# Altium PCB PCB v1.0.PcbDoc
Units mm, origin at the board's own origin, x right, y up, seen from the top; angles counter-clockwise.
Board outline 37.7 x 80 mm, 2 copper layers (Top Layer, Bottom Layer); 68 components, 54 nets, 253 pads, 31 vias.
Unrouted connection lines stored in the file: 10.
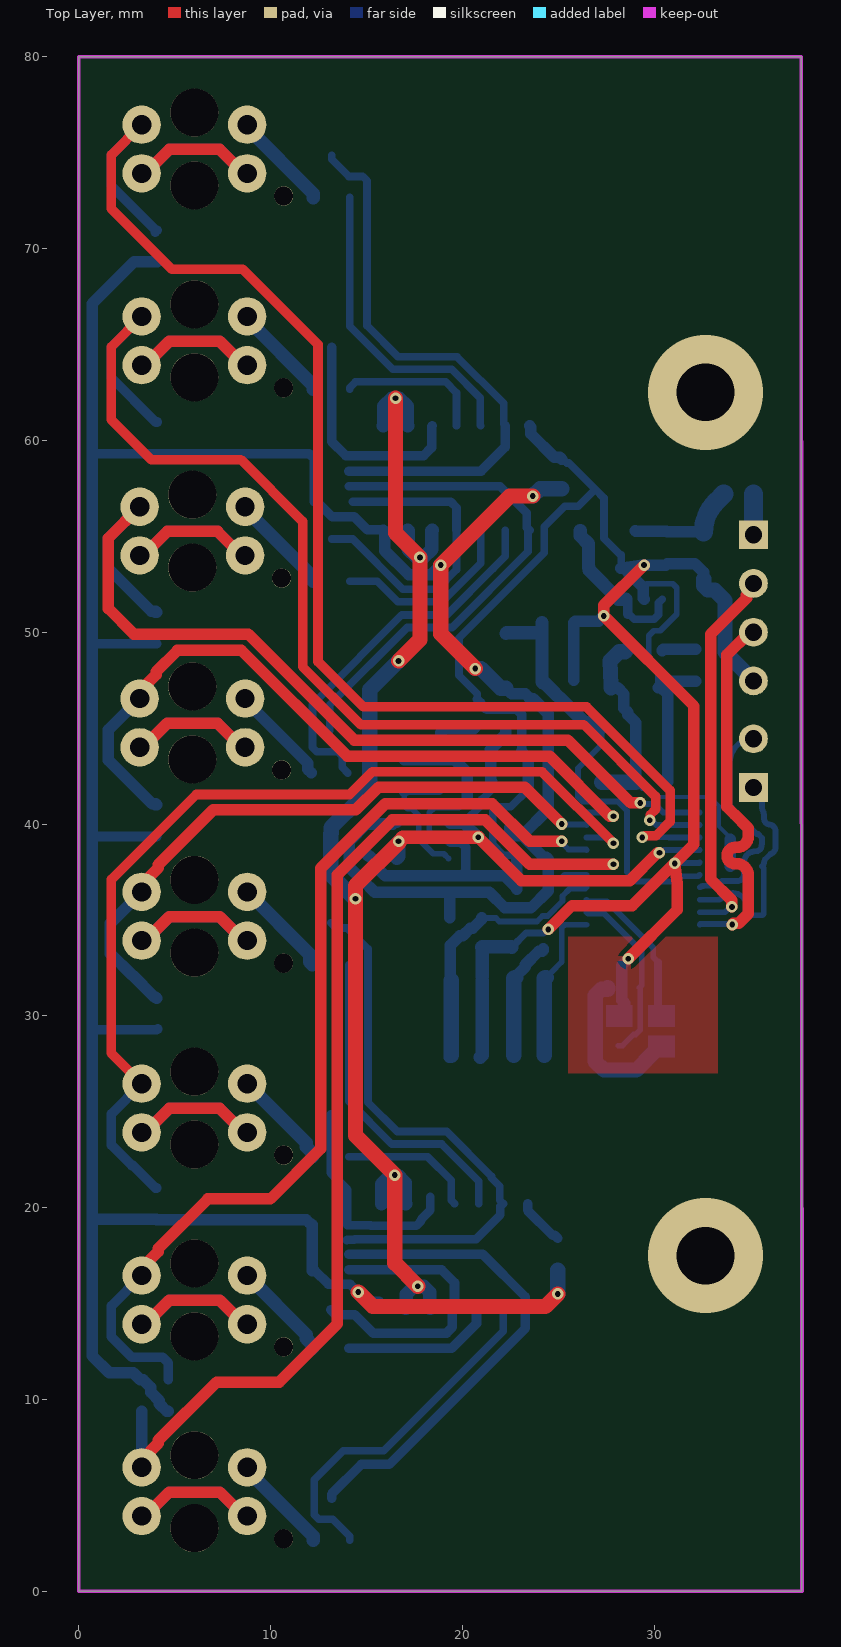
[diagram p0: Top Layer view]
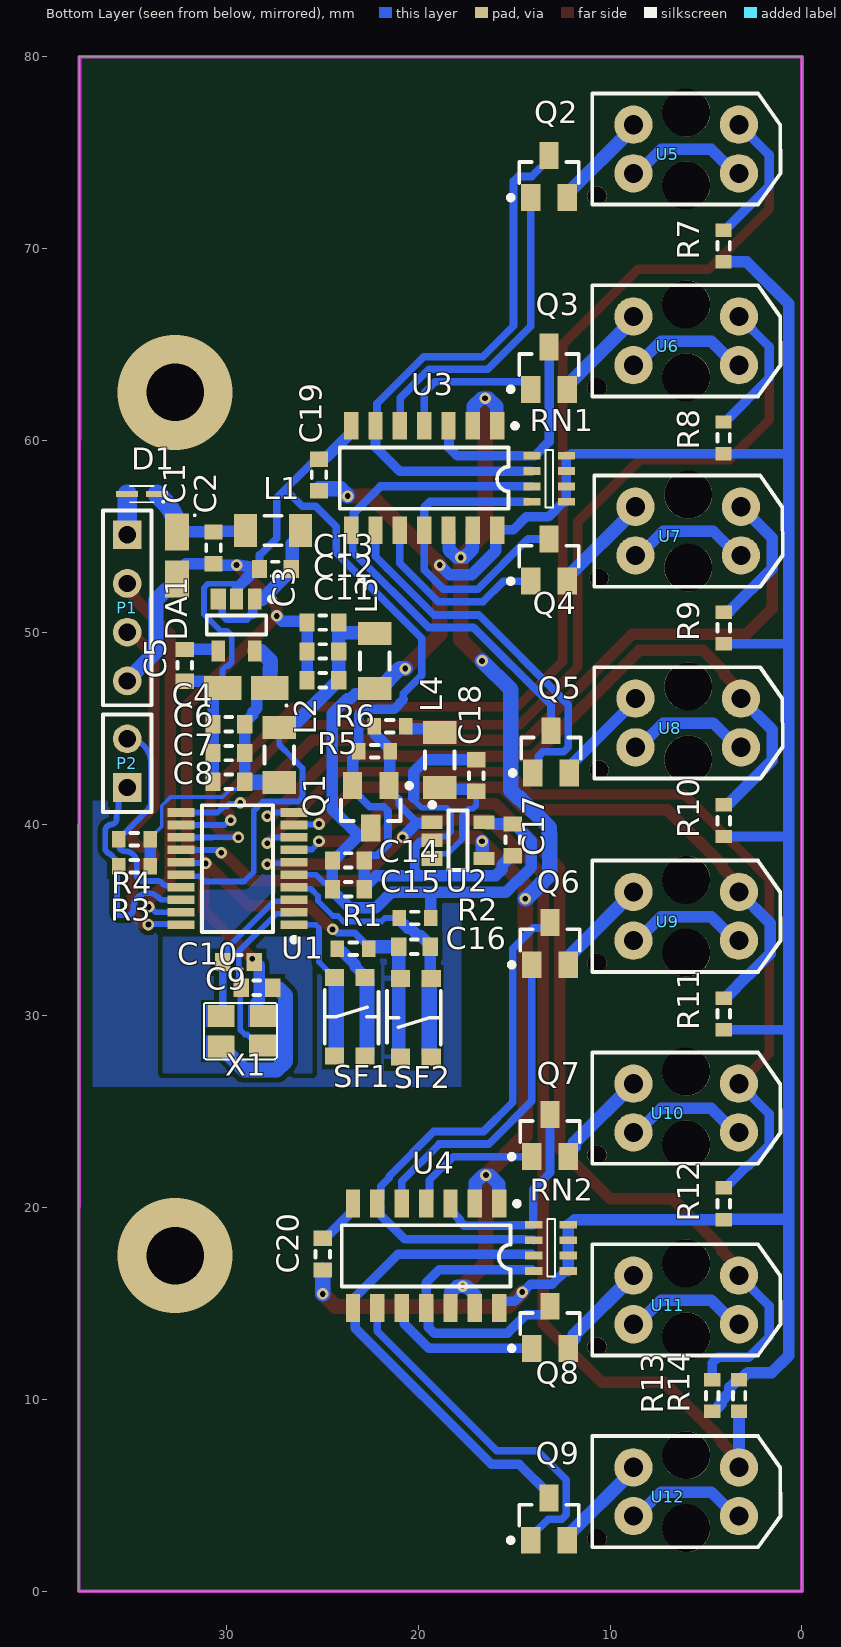
[diagram p1: Bottom Layer view, seen from below]
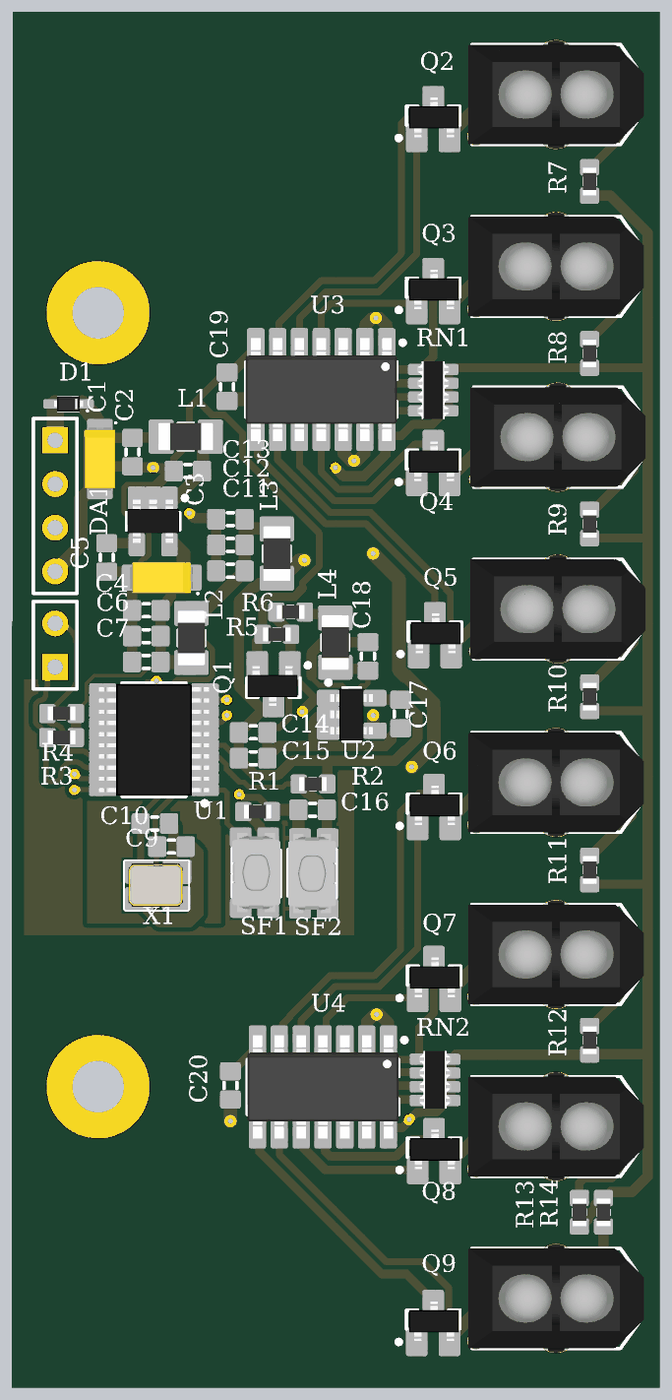
[diagram p2: 3D render of the assembled board from below, using the file's embedded part models]

## Layer stack, top to bottom
Top Solder: solder mask 0.0102, Solder Resist, Dk 3.5
Top Layer: signal copper 0.0356
Dielectric 1: dielectric 0.32, FR-4, Dk 4.8
Bottom Layer: signal copper 0.0356
Bottom Solder: solder mask 0.0102, Solder Resist, Dk 3.5

## Board outline
0,0 0,80 37.67,80 37.7,0

## Design rules (kind name [scope] priority, off if disabled: settings)
Clearance [All] p1: gap=0.254 ignorepadtopadclearanceinfootprint=FALSE except(0: Arc-Hole Track-Hole SMDPad-Hole THPad-Hole Via-Hole Fill-Hole Poly-Hole Region-Hole Text-Hole; 0.127: SMDPad-SMDPad; 0.2: Arc-SMDPad Track-SMDPad; 0.33: Arc-THPad Track-THPad)
DiffPairsRouting [All] p1: maxlimit=0.254 minlimit=0.254 mostfreqgap=0.254 toplayer_minwidth=0.254 toplayer_maxwidth=0.381 toplayer_prefwidth=0.381 bottomlayer_minwidth=0.254 bottomlayer_maxwidth=0.381 bottomlayer_prefwidth=0.381 maxuncoupledlength=12.7
HoleSize [All] p1: absolutevalues=TRUE maxlimit=6.3 minlimit=0.3 maxpercent=80.000 minpercent=20.000
HoleToHoleClearance [All] p1: gap=0.54 allowstackedmicrovias=TRUE
PasteMaskExpansion [All] p1: expansion=0.13
PolygonConnect [All] p1: connectstyle=Relief reliefconductorwidth=0.254 reliefentries=4 polygonreliefangle="90 Angle" airgapwidth=0.254
RoutingCorners [All] p1: cornerstyle=Round minsetback=2.54 maxsetback=2.54
RoutingVias [All] p1: holewidth=0.3 width=0.6 viastyle="Through Hole" minholewidth=0.3 minwidth=0.6 maxholewidth=6.3 maxwidth=6.5
SilkToSolderMaskClearance [IsPad] p1: minsilkscreentomaskgap=0.15 clearancetoexposedcopper=TRUE
SolderMaskExpansion [All] p1: expansion=0.05 istentingtop=FALSE
Width [All] p1: maxlimit=2 minlimit=0.127 preferedwidth=0.3
24 further rules are at their usual default settings.

## Classes and differential pairs
component class Schematic_page3: C17 C18 C19 C20 L4 Q1 Q2 Q3 Q4 Q5 Q6 Q7 Q8 Q9 R5 R6 R7 R8 R9 R10 R11 R12 R13 R14 U2 U3 U4 U5 U6 U7 U8 U9 U10 U11 U12
component class Schematic_page2: C9 C10 C16 P1 P2 R1 R2 R3 R4 SF1 SF2 U1 X1
component class Schematic_page1: C1 C2 C3 C4 C5 C6 C7 C8 C11 C12 C13 C14 C15 D1 D? DA1 DA? L1 L2 L3

## Components (designator, comment, footprint, x,y, rotation, side; value= is the part's Value field where it differs from the comment)
C1 "2.2 uF" TANT-A 32.575,54 r270 bottom
C2 "0.1 uF" C0603 30.675,54.4 r270 bottom
C3 "0.1 uF" C0603 27.45,53.3 r0 bottom
C4 "2.2 uF" TANT-A 28.975,47.1 r0 bottom
C5 "0.01 uF" C0603 32.175,48.275 r270 bottom
C6 "0.1 uF" C0603 29.875,45.2 r0 bottom
C7 "0.01 uF" C0603 29.875,43.7 r0 bottom
C8 "100 pF" C0603 29.875,42.2 r0 bottom
C9 "20 pF" C0603 28.412,31.463 r180 bottom
C10 "20 pF" C0603 29.375,32.8 r180 bottom
C11 "1 uF" C0603 24.975,47.5 r0 bottom
C12 "0.1 uF" C0603 24.975,49 r0 bottom
C13 "100 pF" C0603 24.975,50.5 r0 bottom
C14 "1 uF" C0603 23.65,38.1 r180 bottom
C15 "0.01 uF" C0603 23.65,36.6 r180 bottom
C16 "0.1 uF" C0603 20.2,33.6 r0 bottom
C17 "0.1 uF" C0603 15.075,39.175 r270 bottom
C18 "4.7 uF" C0603 16.975,42.525 r90 bottom
C19 "0.1 uF" C0603 25.175,58.2 r90 bottom
C20 "0.1 uF" C0603 24.975,17.575 r90 bottom
D1 "" SOD-523 34.4,57.2 r0 bottom
DA1 "TPS73033DBVR" SOT-23-5 29.476,50.378 r270 bottom
L1 "120R@100MHz" IND1206 27.575,55.3 r180 bottom
L2 "120R@100MHz" IND1206 27.25,43.593 r90 bottom
L3 "120R@100MHz" IND1206 22.275,48.5 r270 bottom
L4 "100 uH" IND1206 18.875,43.33 r270 bottom
P1 "SerialWire Debug" HDR1X4 35.175,55.08 r270 bottom
P2 "Header 2" HDR1X2 35.175,41.9 r90 bottom
Q1 "2N7002" SOT-23-3 22.475,40.9 r270 bottom
Q2 "MMBFJ201" SOT-23-3 13.182,73.76 r90 bottom
Q3 "MMBFJ201" SOT-23-3 13.182,63.76 r90 bottom
Q4 "MMBFJ201" SOT-23-3 13.182,53.76 r90 bottom
Q5 "MMBFJ201" SOT-23-3 13.082,43.76 r90 bottom
Q6 "MMBFJ201" SOT-23-3 13.131,33.76 r90 bottom
Q7 "MMBFJ201" SOT-23-3 13.131,23.76 r90 bottom
Q8 "MMBFJ201" SOT-23-3 13.131,13.76 r90 bottom
Q9 "MMBFJ201" SOT-23-3 13.181,3.76 r90 bottom
R1 "10 k" R0603 23.4,33.5 r0 bottom
R2 "10 k" R0603 20.175,35.1 r0 bottom
R3 "10 k" R0603 34.8,37.8 r0 bottom
R4 "10 k" R0603 34.8,39.2 r0 bottom
R5 "10 k" R0603 22.275,43.8 r0 bottom
R6 "10 k" R0603 21.475,45.1 r0 bottom
R7 "200 R" R0603 4.081,70.135 r270 bottom
R8 "200 R" R0603 4.081,60.135 r270 bottom
R9 "200 R" R0603 4.075,50.225 r270 bottom
R10 "200 R" R0603 4.075,40.175 r270 bottom
R11 "200 R" R0603 4.075,30.1 r270 bottom
R12 "200 R" R0603 4.075,20.2 r270 bottom
R13 "200 R" R0603 4.675,10.2 r270 bottom
R14 "200 R" R0603 3.275,10.2 r90 bottom
RN1 "2.2 k" RN_YC164-JR-072K2L 13.175,58 r0 bottom
RN2 "2.2 k" RN_YC164-JR-072K2L 13.075,17.9 r0 bottom
SF1 "Button" KMR221GLFS 22.175,27.45 r90 bottom
SF2 "Button" KMR221GLFS 21.525,32.4 r270 bottom
U1 "STM32F030F4P6" TSSOP-20 29.425,37.675 r0 bottom
U2 "AD8601WDRTZ-REEL7" SOT-23-5 17.928,39.149 r180 bottom
U3 "LM3900" SOIC-14 19.691,58.035 r270 bottom
U4 "LM3900" SOIC-14 19.592,17.485 r270 bottom
U5 "TCRT5000" TCRT5000 6.031,75.19 r270 bottom
U6 "TCRT5000" TCRT5000 6.031,65.19 r270 bottom
U7 "TCRT5000" TCRT5000 5.925,55.27 r270 bottom
U8 "TCRT5000" TCRT5000 5.925,45.27 r270 bottom
U9 "TCRT5000" TCRT5000 6.031,35.19 r270 bottom
U10 "TCRT5000" TCRT5000 6.031,25.19 r270 bottom
U11 "TCRT5000" TCRT5000 6.031,15.19 r270 bottom
U12 "TCRT5000" TCRT5000 6.031,5.19 r270 bottom
X1 "24.0000MHZ" TSX-3225 29.275,29.175 r0 bottom

## Footprints (in the part's own frame and the unit in brackets; to place one, negate y for a bottom-side part, rotate by r counter-clockwise, add the part's x,y. Pads: shape width x height; smd on the part's side, far side on the other; paste and mask are expansions set on the pad)
C0603 [mm]
  rect 0.8x0.95 smd: 1(-0.825,0) 2(0.825,0)
  silkscreen extent -0.18,-0.38 0.18,0.38, body extent -0.8,-0.4 0.8,0.4, height 0.5
HDR1X2 [mm] "Connector; Header; 2 Position"
  rect 1.5x1.5 hole 0.9: 1(0,0)
  round 1.5 hole 0.9: 2(2.54,0)
  silkscreen extent -1.27,-1.27 3.81,1.27
HDR1X4 [mm] "Connector; Header; 4 Position"
  rect 1.5x1.5 hole 0.9: 1(0,0)
  round 1.5 hole 0.9: 2(2.54,0) 3(5.08,0) 4(7.62,0)
  silkscreen extent -1.27,-1.27 8.89,1.27
IND1206 [mm]
  rect 1.2x1.74 smd: 1(-1.43,0) 2(1.43,0)
  silkscreen extent -0.45,-0.77 0.45,0.77, body extent -1.6,-0.8 1.6,0.8, height 1.8
KMR221GLFS [mm]
  rect 0.9x1 smd mask+0.102: 1(4.55,2.2)
  rect 0.9x1 smd: 2(0.45,2.2) 3(0.45,0.6) 4(4.55,0.6)
  silkscreen extent 1.1,-0.1 3.9,2.7, body extent 0.2,-0.1 4.8,2.7, height 1.92
R0603 [mm]
  rect 0.7x0.85 smd: 1(-0.825,0) 2(0.825,0)
  silkscreen extent -0.2,-0.33 0.2,0.33, body extent -0.8,-0.4 0.8,0.4, height 0.5
RN_YC164-JR-072K2L [mm] "Chip Array, ConvexE, 8-Leads, Pitch 0,80mm,  Body 3,20x1,60mm,  IPC Medium Density"
  rect 0.9x0.4 smd: 1(-0.9,1.2) 2(-0.9,0.4) 3(-0.9,-0.4) 4(-0.9,-1.2) 5(0.9,-1.2) 6(0.9,-0.4) 7(0.9,0.4) 8(0.9,1.2)
  silkscreen extent -0.2,-1.5 0.2,1.5, body extent -0.92,-1.68 0.92,1.68, height 0.7
SOD-523 [mm]
  rect 1.15x0.3 smd: 1(-0.775,0) 2(0.775,0)
  silkscreen extent -1.15,-0.43 0.63,0.45, body extent -0.85,-0.45 0.85,0.45, height 0.7
SOIC-14 [mm] "SOIC, 14-Leads, Body 7,15x3,90mm, Pitch 1,27mm, IPC Medium Density"
  rect 1.45x0.75 smd: 1(-2.725,3.81) 2(-2.725,2.54) 3(-2.725,1.27) 4(-2.725,0) 5(-2.725,-1.27) 6(-2.725,-2.54) 7(-2.725,-3.81) 8(2.725,-3.81) 9(2.725,-2.54) 10(2.725,-1.27) 11(2.725,0) 12(2.725,1.27) 13(2.725,2.54) 14(2.725,3.81)
  silkscreen extent -2.85,-4.4 1.6,4.86, body extent -3,-4.4 3,4.4, height 1.75
SOT-23-3 [mm]
  rect 1.4x1 smd: 1(-1.1,0.95) 2(-1.1,-0.95) 3(1.1,0)
  silkscreen extent -1.22,-1.55 0.75,2.12, body extent -1.05,-1.5 1.25,1.4, height 1
SOT-23-5 [mm] "SOT23, 5-Leads, Body 2,90x2,80mm, Pitch 0,95mm, IPC High Density"
  rect 1.1x0.7 smd: 1(-1.347,0.951) 2(-1.347,0.001) 4(1.353,-0.949) 5(1.353,0.951)
  rect 1.1x0.8 smd: 3(-1.347,-0.949)
  silkscreen extent -1.47,-1.55 0.5,1.98, body extent -1.25,-1.5 1.25,1.5, height 1.09
TANT-A [mm]
  rect 1.95x1.25 smd: 1(-1.225,0) 2(1.225,0)
  silkscreen extent -2.15,0.87 -2.05,0.97, body extent -2.39,-0.9 2.41,0.9, height 1.8
TCRT5000 [mm]
  round 2 hole 1: 1(-1.27,2.75) 2(1.27,2.75) 3(1.27,-2.75) 4(-1.27,-2.75)
  round 2.5 hole 2.5: 5(-1.9,0) 7(1.9,0)
  round 1 hole 1: 6(2.45,-4.65)
  silkscreen extent -2.9,-4.9 2.9,4.92, body extent -3.5,-5.1 3.5,5.1, height 7.02
TSSOP-20 [mm]
  rect 1.4x0.45 smd: 1(-2.95,2.925) 2(-2.95,2.275) 3(-2.95,1.625) 4(-2.95,0.975) 5(-2.95,0.325) 6(-2.95,-0.325) 7(-2.95,-0.975) 8(-2.95,-1.625) 9(-2.95,-2.275) 10(-2.95,-2.925) 11(2.95,-2.925) 12(2.95,-2.275) 13(2.95,-1.625) 14(2.95,-0.975) 15(2.95,-0.325) 16(2.95,0.325) 17(2.95,0.975) 18(2.95,1.625) 19(2.95,2.275) 20(2.95,2.925)
  silkscreen extent -3.07,-3.3 1.85,3.82, body extent -3.2,-3.25 3.2,3.25, height 1.1
TSX-3225 [mm] "Crystal"
  rect 1.4x1.15 smd: 1(-1.15,0.725) 2(1,0.775) 3(1,-0.825) 4(-1.2,-0.825)
  Top Layer region: 0.4,1.35 1.8,1.35 1.8,0.2 0.4,0.2
  Top Layer region: 0.4,-0.25 1.8,-0.25 1.8,-1.4 0.4,-1.4
  Top Layer region: -1.8,-0.25 -0.4,-0.25 -0.4,-1.4 -1.8,-1.4
  silkscreen extent -1.9,-1.5 1.9,1.45, body extent -1.55,-1.3 1.65,1.2, height 0.6

## Part data
C1 C4: library part Capasitor_Tantalum
C2 C3 C5 C9 C10 C11 C12 C13 C14 C15 C16 C17 C18 C19 C20: library part Capasitor
C6 C7 C8: library part Capasitor, Case=С0603
D1: library part "Diode Schottky"
DA1: library part TPS73033DBV, "IC REG LINEAR 3.3V 200MA SOT 23-5", Case=SOT-23-5, Manufacturer="Texas Instruments", HelpURL=https://www.digikey.com/product-detail/en/texas-instruments/TPS73033DBVR/296-17580-1-ND/705377, Model=TPS73033DBVR
L1 L2 L3 L4: library part Inductivity
P1: library part "Header 4", "Header, 4-Pin", LatestRevisionDate=17-Jul-2002, LatestRevisionNote="Re-released for DXP Platform.", Publisher="Altium Limited"
P2: "Header, 2-Pin", LatestRevisionDate=17-Jul-2002, LatestRevisionNote="Re-released for DXP Platform.", Publisher="Altium Limited"
Q1: "MOSFET N-Channel 60V 115mA (Ta) 200mW (Ta) Surface Mount SOT-23 (TO-236AB)", Case=SOT-23-3, Manufacturer="ON Semiconductor", HelpURL=https://www.digikey.com/product-detail/en/on-semiconductor/2N7002/2N7002NCT-ND/244664, Model="MOSFET N-CH 60V 115MA SOT-23"
Q2 Q3 Q4 Q5 Q6 Q7 Q8 Q9: "JFET N-Channel 40V 350mW Surface Mount SOT-23-3", Case=SOT-23-3, HelpURL=https://www.digikey.com/product-detail/en/on-semiconductor/MMBFJ201/MMBFJ201TR-ND/1049584, Manifacturer="ON Semiconductor", Model=MMBFJ201
R1 R2 R3 R4 R5 R6 R7 R8 R9 R10 R11 R12 R13 R14: library part Resistor
SF1 SF2: "SWITCH TACTILE SPST-NO 0.05A 32V", Case=KMR221GLFS, Manufacturer=C&K, HelpURL=https://www.digikey.com/product-detail/en/c-k/KMR221GLFS/401-1427-1-ND/550466, Model=KMR221GLFS
U1: "IC MCU 32BIT 16KB FLASH 20TSSOP", Case=TSSOP-20, Manufacturer=STMicroelectronics, HelpURL=https://www.digikey.com/product-detail/en/stmicroelectronics/STM32F030F4P6TR/497-17333-1-ND/7650385, Model=STM32F030F4P6TR
U2: library part AD8601, "IC OPAMP GP 1 CIRCUIT SOT23-5", Case=SOT-23-5, Manufacturer="Analog Devices Inc.", HelpURL=https://www.digikey.com/product-detail/en/analog-devices-inc/AD8601WDRTZ-REEL7/AD8601WDRTZ-REEL7TR-ND/2237618, Model=AD8601WDRTZ-REEL7
U3 U4: "IC OPAMP GP 4 CIRCUIT 14SOIC", Case=SOIC-14, Manufacturer="Texas Instruments", HelpURL=https://www.digikey.com/product-detail/en/texas-instruments/LM3900D/296-9564-5-ND/379857, Model=LM3900D
U5 U6 U7 U8 U9 U10 U11 U12: "SENSOR OPTO TRANS 15MM REFL PCB", Manufacturer="Vishay Semiconductor Opto Division", Case=TCRT5000, HelpURL=https://www.digikey.com/product-detail/en/vishay-semiconductor-opto-division/TCRT5000/751-1033-5-ND/1681167, Model=TCRT5000
X1: library part Crystal, "CRYSTAL 24.0000MHZ 9PF SMD", Case=TSX-3225, Manufacturer=EPSON, HelpURL=https://www.digikey.com/product-detail/en/epson/TSX-3225-24-0000MF20G-AC0/SER4185TR-ND/2819192, Model="TSX-3225 24.0000MF20G-AC0"

## Via types
v1: diameter 0.6, hole 0.3, Top Layer to Bottom Layer, 29 vias
v2: diameter 6, hole 3, Top Layer to Bottom Layer, 2 vias

## Nets (pads, with @x,y where several pads share a name; then routed paths per layer and width w, separated by ;. In a path a pad name is that pad's centre, name@x,y a point inside that pad or via, vN(x,y) a via of type N, cw(c..) or ccw(c..) an arc to the next point about the centre after c; other vN are vias at no path point)
AGND: C3.2 C4.2 C5.2 C6.2 C7.2 C8.2 C14.2 C15.2 C17.2 C18.2 C19.2 C20.2 DA1.2 Q1.2 R5.2 U2.2 U3.7 U4.7 U5.2 U5.3 U6.2 U6.3 U7.2 U7.3 U8.2 U8.3 U9.2 U9.3 U10.2 U10.3 U11.2 U11.3 U12.2 U12.3 | length 183.2
  Top Layer w0.6: U8.2 3.362,44 4.612,45.25 7.238,45.25 8.488,44 U8.3 ; U7.2 3.362,54 4.612,55.25 7.238,55.25 8.488,54 U7.3 ; U12.2 3.468,3.92 4.718,5.17 7.344,5.17 8.594,3.92 U12.3 ; U11.2 3.468,13.92 4.718,15.17 7.344,15.17 8.594,13.92 U11.3 ; U10.2 3.468,23.92 4.718,25.17 7.344,25.17 8.594,23.92 U10.3 ; U9.2 3.468,33.92 4.718,35.17 7.344,35.17 8.594,33.92 U9.3 ; U6.2 3.468,63.92 4.718,65.17 7.344,65.17 8.594,63.92 U6.3 ; U5.2 3.468,73.92 4.718,75.17 7.344,75.17 8.594,73.92 U5.3
  Bottom Layer w0.3: U2.2 19.075,39.35 18.53,39.35 18.275,39.605 18.275,40.595 18.53,40.85 19.826,40.85 20.245,41.269 20.245,41.4 ; 29.425,52.332 29.618,52.525 30.97,52.525 31.175,52.32 31.175,50.93 30.316,50.071 29.976,50.071 29.721,49.816 29.721,48.434 29.93,48.225 30.024,48.225 30.2,48.049 C4.2
  Bottom Layer w0.4: 20.775,46.5 20.775,46.798 19.821,47.752 19.821,49.68 24.276,54.136 24.276,55.501 25.345,56.57 26.045,56.57 26.925,57.45 ; C14.2 22.825,38.175 22.625,38.375 22.134,38.375 21.575,38.934 21.575,40.666 21.809,40.9 22.525,40.9 23.425,41.8 Q1.2 ; C19.2@25.25,59.025 25.45,58.825 25.55,58.825 26.088,58.287 26.925,57.45 ; C3.2 28.275,54.03 28.239,54.03 27.379,54.89 27.379,56.996 26.925,57.45
  Bottom Layer w0.5: U2.2 19.375,39.05 19.911,39.05 20.175,38.786 20.175,37.543 19.932,37.3 ; 20.775,46.5 20.955,46.32 20.955,46.284 21.264,45.975 22.836,45.975 23.104,45.707 23.104,44.767 23.1,44.763 R5.2 ; U4.7 23.402,19.86 24.711,18.55 24.825,18.55 C20.2
  Bottom Layer w0.6: U8.2 3.362,44 4.612,45.25 7.238,45.25 8.488,44 U8.3 ; U7.2 3.362,54 4.612,55.25 7.238,55.25 8.488,54 U7.3 ; U12.2 3.468,3.92 4.718,5.17 7.344,5.17 8.594,3.92 U12.3 ; U11.2 3.468,13.92 4.718,15.17 7.344,15.17 8.594,13.92 U11.3 ; U10.2 3.468,23.92 4.718,25.17 7.344,25.17 8.594,23.92 U10.3 ; U9.2 3.468,33.92 4.718,35.17 7.344,35.17 8.594,33.92 U9.3 ; U6.2 3.468,63.92 4.718,65.17 7.344,65.17 8.594,63.92 U6.3 ; U5.2 3.468,73.92 4.718,75.17 7.344,75.17 8.594,73.92 U5.3 ; C17.2 15.15,38.35 15.625,37.875 15.625,37.643 15.968,37.3 19.932,37.3 20.175,37.3 22.2,37.3 C15.2@22.825,36.675 ; C18.2 19.602,43.35 20.245,42.707 20.245,41.4 ; C15.2 C15.2@22.825,36.675 ; C14.2 C15.2@22.825,36.675 ; R5.2 23.1,43.725 23.425,43.4 Q1.2 ; U3.7 23.576,60.685 23.576,60.335 24.786,59.125 25.075,59.125 C19.2 ; C3.2@28.632,53.125 29.425,52.332 29.425,51.775 DA1.2 ; C8.2 C7.2 C6.2 30.7,46.775 30.375,47.1 C4.2 cw(c31.045,46.255) 31.045,47.45 C5.2
AVCC_3V3: C14.1 C15.1 C17.1 C19.1 C20.1 L3.2 Q1.3 R2.1 R7.2 R8.2 R9.2 R10.2 R11.2 R12.2 R13.2 R14.2 RN1.1 RN1.2 RN1.3 RN1.4 RN2.1 RN2.2 RN2.3 RN2.4 U1.5 U2.5 U3.14 U4.14 | length 178.2
  Top Layer w0.8: v1(14.575,15.6) 15.329,14.846 24.321,14.846 v1(24.975,15.5) ; v1(20.675,48.106) 18.875,49.906 v1(18.875,53.5) 22.475,57.1 v1(23.675,57.1)
  Bottom Layer w0.3: C15.1@24.475,36.675 24.725,36.925 24.9,36.925 25.325,37.35 U1.5
  Bottom Layer w0.5: 0.691,29.2 0.766,29.275 R11.2 R11.2@4.11,29.31 ; 0.691,39.3 0.741,39.35 R10.2 ; 0.691,49.4 R9.2 ; 0.691,59.3 0.701,59.31 R8.2 12.015,59.31 12.125,59.2 RN1.4 RN1.3@12.275,58.45 ; RN2.1 12.325,16.7 13.015,16.01 13.818,16.01 13.822,16.006 14.142,16.006 14.548,15.6 v1(14.575,15.6) ; RN1.3 RN1.2 RN1.1 12.425,56.8 13.215,56.01 14.373,56.01 15.049,55.334 15.756,55.334 15.78,55.31 U3.14 ; v1@14.602,15.6 v1(14.575,15.6) ; U4.14 15.782,14.989 15.656,15.114 14.975,15.114 14.594,15.494 14.594,15.581 v1(14.575,15.6) ; v1(23.675,57.1) v1@23.694,57.119 ; C15.1 C15.1@24.475,36.675
  Bottom Layer w0.6: R7.2 2.885,69.31 0.691,67.116 0.691,59.3 0.691,49.4 0.691,39.3 0.691,29.2 0.691,19.4 ; R13.2 4.6,9.375 4.2,9.775 4.2,9.932 3.75,10.382 3.75,10.625 3.35,11.025 R14.2 3.2,11.025 2.834,11.391 1.584,11.391 0.691,12.284 0.691,19.4 ; RN2.4@12.025,19.2 11.85,19.375 R12.2 4.05,19.4 0.691,19.4 ; RN2.1 RN2.2 RN2.3 RN2.4 ; U3.14 15.956,55.235 15.956,54.252 17.212,52.996 18.371,52.996 v1(18.875,53.5) ; U2.5 16.475,40.1 16.375,40 C17.1 15,40 14.1,39.1 14.1,37.743 14.789,37.054 14.823,37.054 15.431,36.446 19.375,36.446 ; R2.1 19.35,36.421 19.375,36.446 ; L3.2 22.566,46.779 23.289,46.779 23.543,46.525 23.7,46.525 24.479,45.746 24.479,40.772 23.107,39.4 ; Q1.3 22.475,39.6 22.675,39.4 23.107,39.4 ; C15.1 24.475,36.525 23.575,35.625 22.218,35.625 21.397,36.446 19.375,36.446 ; C15.1@24.475,36.675 24.475,36.925 C14.1 24.475,38.175 24.375,38.275 24.232,38.275 23.107,39.4
  Bottom Layer w0.8: v1(20.675,48.106) 20.969,48.106 22.005,47.07 L3.2 ; v1@23.694,57.119 24.05,57.475 C19.1@25.175,57.475 ; v1(24.975,15.5) C20.1
BOOT0: SF1.1 SF1.2 U1.1 | length 8
  Bottom Layer w0.3: SF1.1@24.675,32.3 25.175,32.8 25.175,34.574 25.351,34.75 U1.1
  Bottom Layer w0.8: SF1.2@24.275,27.95 24.275,31.95 24.325,32 SF1.1
GND: C1.2 C2.2 C11.2 C12.2 C13.2 C16.2 P1.4 R1.1 SF2.3 SF2.4 U1.15 | length 52.3
  Top Layer w0.6: v1(24.471,34.5) 25.719,35.748 28.853,35.748 31.051,37.946 v1(31.074,37.946) 32.075,38.947 32.075,46.15 v1(27.375,50.85) 27.375,51.4 v1(29.475,53.5)
  Bottom Layer w0.3: v1(31.074,37.946) 31.101,37.973 32.348,37.973 U1.15
  Bottom Layer w0.38: R1.1 22.575,33.575 23.315,34.315 24.226,34.315
  Bottom Layer w0.6: C11.2 C12.2 C13.2 25.875,50.575 27.1,50.575 v1(27.375,50.85) ; v1@29.465,53.5 v1(29.475,53.5) 30.6,53.5 C2.2 32.125,53.575 32.575,53.125 C1.2
  Bottom Layer w0.7: SF2.4 21.025,27.95 SF2.3@21.025,31.85 ; SF2.3@21.025,32.05 21.025,33.55 21,33.575 C16.2 22.55,33.6 R1.1@22.575,33.575
  Bottom Layer w0.8: C1.2 32.575,52.425 32.8,52.2 33.15,52.2 33.695,51.655 33.695,48.964 35.175,47.484 P1.4
NetC1_1: C1.1 C2.1 D1.1 L1.1 | length 5.9
  Bottom Layer w0.6: L1.1 29.042,55.263 30.637,55.263 C2.1 C1.1
  Bottom Layer w1: C1.1 cw(c34.808,55.225) 32.603,55.578 cw(c34.808,55.225) 33.229,56.804 D1.1
NetC3_1: C3.1 DA1.1 DA1.3 L1.2 | length 8.3
  Bottom Layer w0.3: DA1.1@28.521,51.725 DA1.1
  Bottom Layer w0.4: 28.625,50.939 28.696,50.939 28.959,50.675 29.991,50.675 30.225,50.909 30.225,51.525 DA1.3
  Bottom Layer w0.5: DA1.1@28.521,51.725 28.625,51.621 28.625,50.939
  Bottom Layer w0.7: L1.2 26.145,55.03 26.575,54.6 26.575,53.35 C3.1 26.625,53.225 28.125,51.725 DA1.1@28.521,51.725
NetC5_1: C5.1 DA1.4 | length 1.8
  Bottom Layer w0.6: DA1.4 30.425,49.062 30.475,49.113 32.162,49.113 C5.1
NetC18_1: C18.1 L4.2 U2.3 | length 6.9
  Bottom Layer w0.3: C18.1 16.975,40.976 17.151,40.8 17.37,40.8 17.721,40.449 17.721,39.209 18.48,38.45 19.025,38.45 U2.3
  Bottom Layer w0.6: C18.1 17.075,41.8 18.775,41.8 L4.2
NetL4_1: L4.1 R6.1 | length 2
  Bottom Layer w0.6: L4.1 19.09,44.975 20.6,44.975 20.65,45.025 R6.1
NetQ2_2: Q2.2 U5.4 | length 5.2
  Bottom Layer w0.7: U5.4 8.781,76.31 12.232,72.86 Q2.2
NetQ3_2: Q3.2 U6.4 | length 5.2
  Bottom Layer w0.7: U6.4 8.781,66.31 12.232,62.86 Q3.2
NetQ4_2: Q4.2 U7.4 | length 5.2
  Bottom Layer w0.7: U7.4@8.781,56.46 8.781,56.31 12.232,52.86 Q4.2
NetQ5_2: Q5.2 U8.4 | length 5.3
  Bottom Layer w0.6: U8.4 8.675,46.434 11.932,43.178 11.932,42.86 Q5.2
NetQ6_2: Q6.2 U9.4 | length 5.2
  Bottom Layer w0.7: U9.4 12.031,33.21 12.031,32.81 Q6.2
NetQ7_2: Q7.2 U10.4 | length 5.2
  Bottom Layer w0.7: U10.4 11.862,23.38 11.862,23.18 12.181,22.86 Q7.2
NetQ8_2: Q8.2 U11.4 | length 5.2
  Bottom Layer w0.7: U11.4 11.862,13.38 11.862,13.18 12.181,12.86 Q8.2
NetQ9_2: Q9.2 U12.4 | length 5.2
  Bottom Layer w0.7: U12.4 8.781,6.31 12.231,2.86 Q9.2
NetR1_2: R1.2 SF1.3 SF1.4 | length 6.3
  Bottom Layer w0.6: SF1.4 22.775,32.05 23.275,32.55 23.275,32.657 23.993,33.375 24.175,33.375 24.225,33.425 R1.2
  Bottom Layer w0.8: SF1.3@22.675,27.95 22.675,31.95 22.725,32 SF1.4
NRST: C16.1 R2.2 SF2.1 SF2.2 U1.4 | length 14.3
  Bottom Layer w0.3: R2.2 21.747,35.1 21.926,34.921 23.896,34.921 24.179,35.204 24.449,35.204 25.225,35.98 25.225,36.25 25.6,36.625 26.4,36.625 U1.4
  Bottom Layer w0.6: SF2.1 SF2.1@19.425,27.95 ; SF2.2@19.375,32.1 C16.1 19.375,33.675 19.875,34.175 20.018,34.175 20.418,34.575 20.55,34.575 21,35.025 R2.2
  Bottom Layer w0.8: SF2.1@19.425,27.95 SF2.2@19.425,31.85
OSC_GND: C9.2 C10.2 X1.2 X1.4 | length 16.8
  Top Layer w0.6: v1(28.65,32.975) 31.194,35.519 31.194,36.881
  Bottom Layer w0.6: X1.4 28.2,30 28.467,30.267 28.467,30.651 28.3,30.818 28.3,32.625 v1(28.65,32.975)
  Bottom Layer w0.8: C9.2 27.587,31.388 27.256,31.388 26.925,31.057 26.925,27.626 27.38,27.171 29.07,27.171 29.525,27.626 29.525,27.65 X1.2
OSC_IN: C9.1 U1.2 X1.1 | length 9.4
  Bottom Layer w0.29: X1.1 28.35,28.45 28.926,29.026 29.04,29.026 29.274,29.26 29.274,31.426 C9.1
  Bottom Layer w0.3: U1.2 26.55,35.325 27.395,35.325 29.354,33.366 29.354,31.58 C9.1
OSC_OUT: C10.1 U1.3 X1.3 | length 8.3
  Bottom Layer w0.3: U1.3 26.55,35.975 27.528,35.975 29.95,33.553 29.95,33.05 C10.1
  Bottom Layer w0.4: C10.1 30.2,30.275 X1.3@30.475,30
PA0: R14.1 U1.6 U12.1 | length 57.9
  Top Layer w0.6: U12.1 3.281,6.839 4.152,7.709 4.152,7.869 7.185,10.902 10.442,10.902 13.474,13.934 13.474,37.346 16.336,40.209 21.195,40.209 23.504,37.9 v1(27.875,37.9)
  Bottom Layer w0.3: U1.6 26.525,37.95 27.825,37.95 v1(27.875,37.9)
  Bottom Layer w0.6: R14.1 3.278,9.372 3.278,6.463 U12.1
PA1: R13.1 U1.7 U11.1 | length 51.6
  Top Layer w0.6: U11.1 3.281,16.839 4.152,17.709 4.152,17.869 6.736,20.453 9.992,20.453 12.62,23.08 12.62,37.7 15.983,41.063 21.549,41.063 23.512,39.1 v1(25.175,39.1)
  Bottom Layer w0.3: v1(25.175,39.1) 25.175,39.031 25.535,38.671 26.454,38.671 U1.7
  Bottom Layer w0.5: U11.1 1.702,14.88 1.702,13.266 2.772,12.195 4.382,12.195 4.675,11.902 R13.1
PA2: R12.1 U1.8 U10.1 | length 50
  Top Layer w0.5: U10.1 1.702,28.04 1.702,37.114 6.127,41.54 14.115,41.54 15.296,42.721 24.154,42.721 v1(27.875,39)
  Bottom Layer w0.3: U1.8 27.561,39.3 27.861,39 v1(27.875,39)
  Bottom Layer w0.5: U10.1 1.702,24.88 1.702,23.266 2.772,22.195 2.83,22.195 4,21.025 R12.1
PA3: R11.1 U1.9 U9.1 | length 33.9
  Top Layer w0.6: U9.1 3.281,36.839 4.152,37.709 4.152,37.869 7.019,40.736 14.448,40.736 15.629,41.917 23.258,41.917 v1(25.175,40)
  Bottom Layer w0.3: v1(25.175,40) 25.2,39.975 26.45,39.975 U1.9
  Bottom Layer w0.6: U9.1 1.652,34.83 1.652,33.245 2.786,32.11 2.815,32.11 3.95,30.975 4.025,30.975 R11.1
PA4: R10.1 U1.10 U8.1 | length 38.6
  Top Layer w0.6: U8.1 3.175,46.919 4.045,47.789 4.045,47.949 5.146,49.05 8.48,49.05 14.005,43.525 24.55,43.525 27.675,40.4 v1(27.875,40.4)
  Bottom Layer w0.3: U1.10 27.594,40.6 27.794,40.4 v1(27.875,40.4)
  Bottom Layer w0.6: U8.1 1.545,44.91 1.545,43.325 3.82,41.05 4.025,41.05 R10.1 R10.1@4,41
PA5: R9.1 U1.11 U7.1 | length 48.7
  Top Layer w0.6: U7.1 1.545,54.91 1.545,51.23 2.871,49.904 8.834,49.904 14.359,44.379 25.496,44.379 28.775,41.1 v1(29.275,41.1)
  Bottom Layer w0.3: v1(29.275,41.1) 29.332,41.042 29.845,41.042 29.984,40.904 30.167,40.904 30.471,40.6 U1.11
  Bottom Layer w0.6: U7.1 1.545,54.91 1.545,53.325 3.77,51.1 4.025,51.1 R9.1 R9.1@4,51.05
PA6: R8.1 U1.12 U6.1 | length 58.2
  Top Layer w0.5: U6.1 1.702,64.88 1.702,61.073 3.775,59 8.449,59 11.675,55.774 11.675,48.2 14.692,45.183 26.329,45.183 30.079,41.433 30.079,40.767 29.794,40.482 29.794,40.219 v1(29.775,40.2)
  Bottom Layer w0.3: v1(29.775,40.2) 29.856,40.2 30.106,39.95 U1.12
  Bottom Layer w0.5: U6.1 1.702,64.88 1.702,63.265 4.006,60.96 R8.1
PA7: R7.1 U1.13 U5.1 | length 70.2
  Top Layer w0.5: U5.1 1.702,74.88 1.702,72.073 4.857,68.918 5.271,68.918 5.273,68.92 8.556,68.92 12.475,65.001 12.475,48.466 14.838,46.103 26.475,46.103 30.833,41.745 30.833,40.121 30.108,39.396 29.498,39.396 29.402,39.3 v1(29.375,39.3)
  Bottom Layer w0.3: v1(29.375,39.3) 29.379,39.304 30.766,39.304 30.77,39.3 U1.13
  Bottom Layer w0.5: U5.1 1.702,74.88 1.702,73.265 4.006,70.96 R7.1 R7.1@3.981,70.86
SCL: P2.2 R4.2 U1.17 | length 11.6
  Bottom Layer w0.3: U1.17 cw(c32.555,36.46) 32.465,36.746 ccw(c32.3,37.275) 32.494,36.756 cw(c32.599,36.475) 32.6,36.775 33.075,36.775 ccw(c33.075,37.125) 33.351,36.91 cw(c33.587,36.725) 33.589,37.025 34.325,37.025 ccw(c34.325,37.375) 34.675,37.375 34.675,37.71 cw(c34.975,37.71) 34.676,37.737 ccw(c33.975,37.8) 34.679,37.8 34.679,37.984 cw(c35.27,37.984) 35.27,38.575 35.301,38.575 ccw(c35.301,38.875) 35.597,38.83 ccw(c33.125,39.2) R4.2 35.625,39.275 35.425,39.475 35.35,39.475 34.035,40.79 34.035,40.862 33.945,40.951 33.945,43.21 cw(c35.175,43.21) P2.2
SDA: P2.1 R3.2 U1.18 | length 11.6
  Bottom Layer w0.3: U1.18 33.307,36.05 ccw(c33.307,36.35) 33.529,36.149 cw(c34.094,35.637) 34.855,35.637 34.855,35.558 ccw(c35.175,35.558) 35.175,35.238 35.575,35.238 ccw(c35.575,35.375) 35.713,35.375 35.713,37.712 R3.2 35.636,37.811 35.713,37.888 cw(c36.245,37.888) 35.78,38.146 36.063,38.43 cw(c36.215,38.171) 36.104,38.45 ccw(c35.975,38.775) 36.117,38.455 ccw(c35.975,38.775) 36.325,38.775 36.325,39.625 ccw(c35.975,39.625) 36.004,39.974 cw(c36.029,40.273) 35.729,40.273 35.729,40.37 ccw(c34.875,40.37) 35.652,40.724 cw(c35.925,40.849) 35.625,40.849 35.625,41.45 ccw(c35.175,41.45) P2.1
SWCLK: P1.3 U1.20 | length 20
  Top Layer w0.6: v1(34.066,34.759) 34.129,34.822 34.405,34.822 34.909,35.327 34.909,37.025 34.909,37.325 ccw(c34.309,37.325) 34.309,37.925 34.226,37.925 cw(c34.226,38.352) 34.226,38.779 34.309,38.779 ccw(c34.309,39.379) 34.909,39.379 34.909,39.783 34.173,40.52 34.164,40.52 33.795,40.889 33.795,48.82 34.975,50 P1.3
  Bottom Layer w0.3: U1.20 32.406,34.781 34.01,34.781 34.033,34.759 v1(34.066,34.759)
SWDIO: P1.2 U1.19 | length 20
  Top Layer w0.6: v1(34.051,35.676) 34.051,36.024 32.941,37.134 32.941,49.897 34.813,51.769 34.813,51.934 35.175,52.296 P1.2
  Bottom Layer w0.3: U1.19 33.694,35.4 v1@33.886,35.592 ; v1@33.886,35.592 cw(c34.097,35.379) 34.031,35.671 v1(34.051,35.676)
U3_1IN-: Q2.3 RN1.6 U3.6 | length 29.8
  Bottom Layer w0.4: Q2.3 13.182,74.66 14.082,73.76 14.797,73.76 15.032,73.526 15.032,65.968 16.642,64.358 19.717,64.358 22.149,61.926 22.149,60.843 U3.6
  Bottom Layer w0.5: RN1.6 20.975,58.4 22.231,59.656 U3.6
U3_1OUT: Q2.1 U3.5 | length 16.5
  Bottom Layer w0.4: Q2.1 14.132,65.944 16.371,63.704 19.446,63.704 20.94,62.21 20.94,60.782 U3.5
U3_2IN-: Q3.3 RN1.5 U3.3 | length 11.8
  Bottom Layer w0.5: Q3.3 13.182,59.943 13.925,59.2 RN1.5 17.975,59.2 18.398,59.623 18.398,60.736 U3.3
U3_2OUT: Q3.1 U3.4 | length 7.7
  Bottom Layer w0.4: Q3.1 14.132,62.75 14.432,63.05 19.125,63.05 19.691,62.484 U3.4
U3_3IN-: Q5.3 RN1.7 U3.8 | length 27
  Bottom Layer w0.4: Q5.3 13.082,46.207 17.121,50.246 19.462,50.246 23.419,54.203 23.419,55.227 U3.8
  Bottom Layer w0.45: RN1.7 21.97,57.6 23.351,56.219 23.351,55.46 U3.8
U3_3OUT: Q5.1 U3.9 | length 19.6
  Bottom Layer w0.4: Q5.1 13.731,42.96 13.731,43.526 13.497,43.76 12.416,43.76 12.181,43.994 12.181,46.206 12.428,46.453 12.428,46.477 16.85,50.9 19.175,50.9 19.209,50.934 19.225,50.934 21.615,53.324 21.615,53.34 22.231,53.956 U3.9
U3_4IN-: Q4.3 RN1.8 U3.11 | length 16.8
  Bottom Layer w0.4: Q4.3 14.282,54.86 16.9,52.242 18.683,52.242 19.691,53.25 U3.11
  Bottom Layer w0.45: RN1.8@14.3,56.8 19.388,56.8 19.691,56.496 U3.11
U3_4OUT: Q4.1 U3.10 | length 9.8
  Bottom Layer w0.4: Q4.1 15.557,52.66 16.629,51.588 18.954,51.588 20.961,53.595 U3.10
U4_1IN-: Q6.3 RN2.6 U4.6 | length 29.4
  Bottom Layer w0.4: Q6.3 13.414,34.578 13.997,34.578 15.075,33.5 15.075,25.491 16.598,23.968 19.188,23.968 21.515,21.64 21.515,21.56 21.956,21.119 21.956,20.385 U4.6
  Bottom Layer w0.45: RN2.6 14,18.325 14.367,18.325 14.398,18.356 20.709,18.356 21.982,19.629 21.982,20.06 U4.6
U4_1OUT: Q6.1 U4.5 | length 16.8
  Bottom Layer w0.4: Q6.1 14.081,25.56 16.327,23.314 18.917,23.314 20.862,21.369 U4.5
U4_2IN-: Q7.3 RN2.5 U4.3 | length 11.6
  Bottom Layer w0.45: Q7.3 13.131,21.809 14,20.94 14,19.075 15.215,19.075 15.23,19.06 17.603,19.06 17.852,19.309 17.852,19.39 18.322,19.86 U4.3@18.322,20.56
U4_2OUT: Q7.1 U4.4 | length 7.1
  Bottom Layer w0.4: Q7.1 18.182,22.66 19.416,21.425 19.416,20.385 U4.4
U4_3IN-: Q9.3 RN2.7 U4.8 | length 25.7
  Bottom Layer w0.5: Q9.3 13.181,5.06 14.741,6.619 16.191,6.619 23.276,13.705 23.276,14.635 U4.8 23.276,14.885 23.276,15.351 21.068,17.56 RN2.7@14.081,17.56
U4_3OUT: Q9.1 U4.9 | length 18.6
  Bottom Layer w0.4: Q9.1 14.131,2.86 13.231,3.76 12.516,3.76 12.281,3.994 12.281,5.806 13.798,7.323 15.899,7.323 22.132,13.556 U4.9
U4_4IN-: Q8.3 RN2.8 U4.11 | length 15.1
  Bottom Layer w0.5: Q8.3@13.132,14.674 13.381,14.424 14.381,14.424 15.345,13.46 19.174,13.46 19.466,13.753 U4.11@19.466,14.76 ; RN2.8@14.081,16.76 18.915,16.76 19.592,16.084 U4.11
U4_4OUT: Q8.1 U4.10 | length 8
  Bottom Layer w0.5: Q8.1 19.44,12.66 20.736,13.957 20.736,14.635 U4.10
V_REF: Q1.1 R5.1 R6.2 U1.14 U2.1 U2.4 U3.1 U3.2 U3.12 U3.13 U4.1 U4.2 U4.12 U4.13 | length 94.9
  Top Layer w0.6: v1(20.821,39.305) 23.08,37.046 28.721,37.046 30.175,38.5 v1(30.275,38.5)
  Top Layer w0.7: v1(16.675,39.1) 16.88,39.305 v1(20.821,39.305)
  Top Layer w0.8: v1(16.516,62.2) 16.516,55.17 v1(17.786,53.9) 17.786,49.611 v1(16.675,48.5) ; v1@16.71,39.065 14.428,36.782 14.428,23.747 v1(16.475,21.7) 16.475,17.1 v1(17.675,15.9)
  Bottom Layer w0.3: v1(30.275,38.5) 30.356,38.5 30.506,38.65 U1.14
  Bottom Layer w0.4: 20.076,40.05 20.076,40.092 20.999,41.015 20.999,41.274 21.525,41.8 Q1.1 Q1.1@21.525,42.2
  Bottom Layer w0.5: U2.1 U2.1@19.292,40.117
  Bottom Layer w0.6: U2.1@19.292,40.117 19.359,40.05 20.076,40.05 v1(20.821,39.305) ; Q1.1@21.525,42.2 21.487,42.237 21.487,43.763 R5.1 21.45,43.875 22.25,44.675 22.25,45.05 R6.2
  Bottom Layer w0.7: U4.1 15.806,20.235 15.806,21.231 16.275,21.7 v1(16.475,21.7) 16.616,21.7 17.027,21.29 17.027,20.235 U4.2 ; U3.1 15.906,60.785 15.906,61.79 16.317,62.2 v1(16.516,62.2) 16.716,62.2 17.126,61.79 17.126,60.785 U3.2 ; U2.4@16.575,38.204 16.675,38.304 v1(16.675,39.1) ; U4.13 17.076,14.785 17.076,15.49 17.487,15.9 v1(17.675,15.9) 17.969,15.9 17.975,15.906 18.297,15.584 18.297,14.785 U4.12 ; U3.13 17.176,55.285 17.176,54.31 17.587,53.9 v1(17.786,53.9) 17.986,53.9 18.396,54.31 18.396,55.285 U3.12
  Bottom Layer w0.8: v1(14.428,36.1) 14.394,36.1 13.146,37.348 13.146,39.495 13.163,39.512 13.163,39.811 14.711,41.36 14.78,41.36 15.175,41.755 15.175,47 v1(16.675,48.5)
VCC_3V3: C4.1 C6.1 C7.1 C8.1 DA1.5 L2.1 R3.1 R4.1 | length 18.2
  Bottom Layer w0.2: C8.1@29.05,42.125 29.35,41.825 29.776,41.825 30.193,41.408 32.916,41.408 33.375,40.949 33.375,39.875 33.975,39.275 R4.1
  Bottom Layer w0.5: C8.1@29.05,42.125 C8.1
  Bottom Layer w0.6: L2.1 L2.1@27.269,42.181 ; C4.1 28.1,47.1 28.425,46.775 28.425,46.025 28.62,45.83 28.62,45.705 29.05,45.275 C6.1 C7.1 C8.1 ; R3.1 R4.1
  Bottom Layer w0.8: L2.1@27.269,42.181 C8.1@29.031,42.181 ; C4.1 27.745,47.243 27.7,48.504 28.172,48.975 28.475,48.975 DA1.5
VCC_5V_IN: D1.2 P1.1 | length 2.1
  Bottom Layer w1: P1.1 D1.2
VDD: C11.1 C12.1 C13.1 L2.2 L3.1 U1.16 | length 23.3
  Bottom Layer w0.3: L2.2 27.25,44.127 26.563,43.44 26.03,42.907 26.03,41.418 26.273,41.175 28.096,41.175 28.579,40.692 28.579,37.5 29.083,36.996 31.119,36.996 31.398,37.275 32.3,37.275 U1.16
  Bottom Layer w0.7: L3.1 22.31,49.965 24.1,49.965 24.15,50.015 C13.1 ; 24.15,49.965 C12.1 24.15,47.425 24.2,47.375 24.275,47.375 24.85,46.8 24.85,46.797 25.172,46.475 25.175,46.475 26.377,45.273 27,45.273 L2.2
pads on no net: U5.5 U5.6 U5.7 U6.5 U6.6 U6.7 U7.5 U7.6 U7.7 U8.5 U8.6 U8.7 U9.5 U9.6 U9.7 U10.5 U10.6 U10.7 U11.5 U11.6 U11.7 U12.5 U12.6 U12.7
copper on no net: | length 2.3
  Top Layer w0.6: 31.074,37.946 31.194,36.881
  Bottom Layer w0.6: 28.25,53.325 29.47,53.525
  other v2: 32.675,17.5 32.675,62.5

## Polygon pours and split planes (outlines as drawn)
GND on Bottom Layer "GND_L02_P005" (solid, pour order 5): 17.766,26.3 17.766,36 24.596,36 25.116,36.52 25.116,41.225 31.041,41.225 31.066,41.2 36.975,41.2 36.975,26.3
no net on Bottom Layer "NONET_L02_P002" (solid, pour order 2): 33.325,34.125 25.525,34.125 25.525,27 33.325,27
AGND on Bottom Layer "AGND_L02_P007" (solid, pour order 7): -12.325,42.5
no net on Bottom Layer "NONET_L02_P003" (solid, pour order 3): 29.375,32.25
OSC_GND on Top Layer "OSC_GND_L01_P004" (solid, pour order 4): 33.325,34.125 25.525,34.125 25.525,27 33.325,27

## Keep-outs
Keep-Out Layer:
  the board outline again, w0.2